# Altium PCB PCB1.PcbDoc
Units mm, origin at the board's own origin, x right, y up, seen from the top; angles counter-clockwise.
Board outline 152.4 x 101.6 mm, 2 copper layers (Top Layer, Bottom Layer); 11 components, 8 nets, 24 pads, 2 vias.
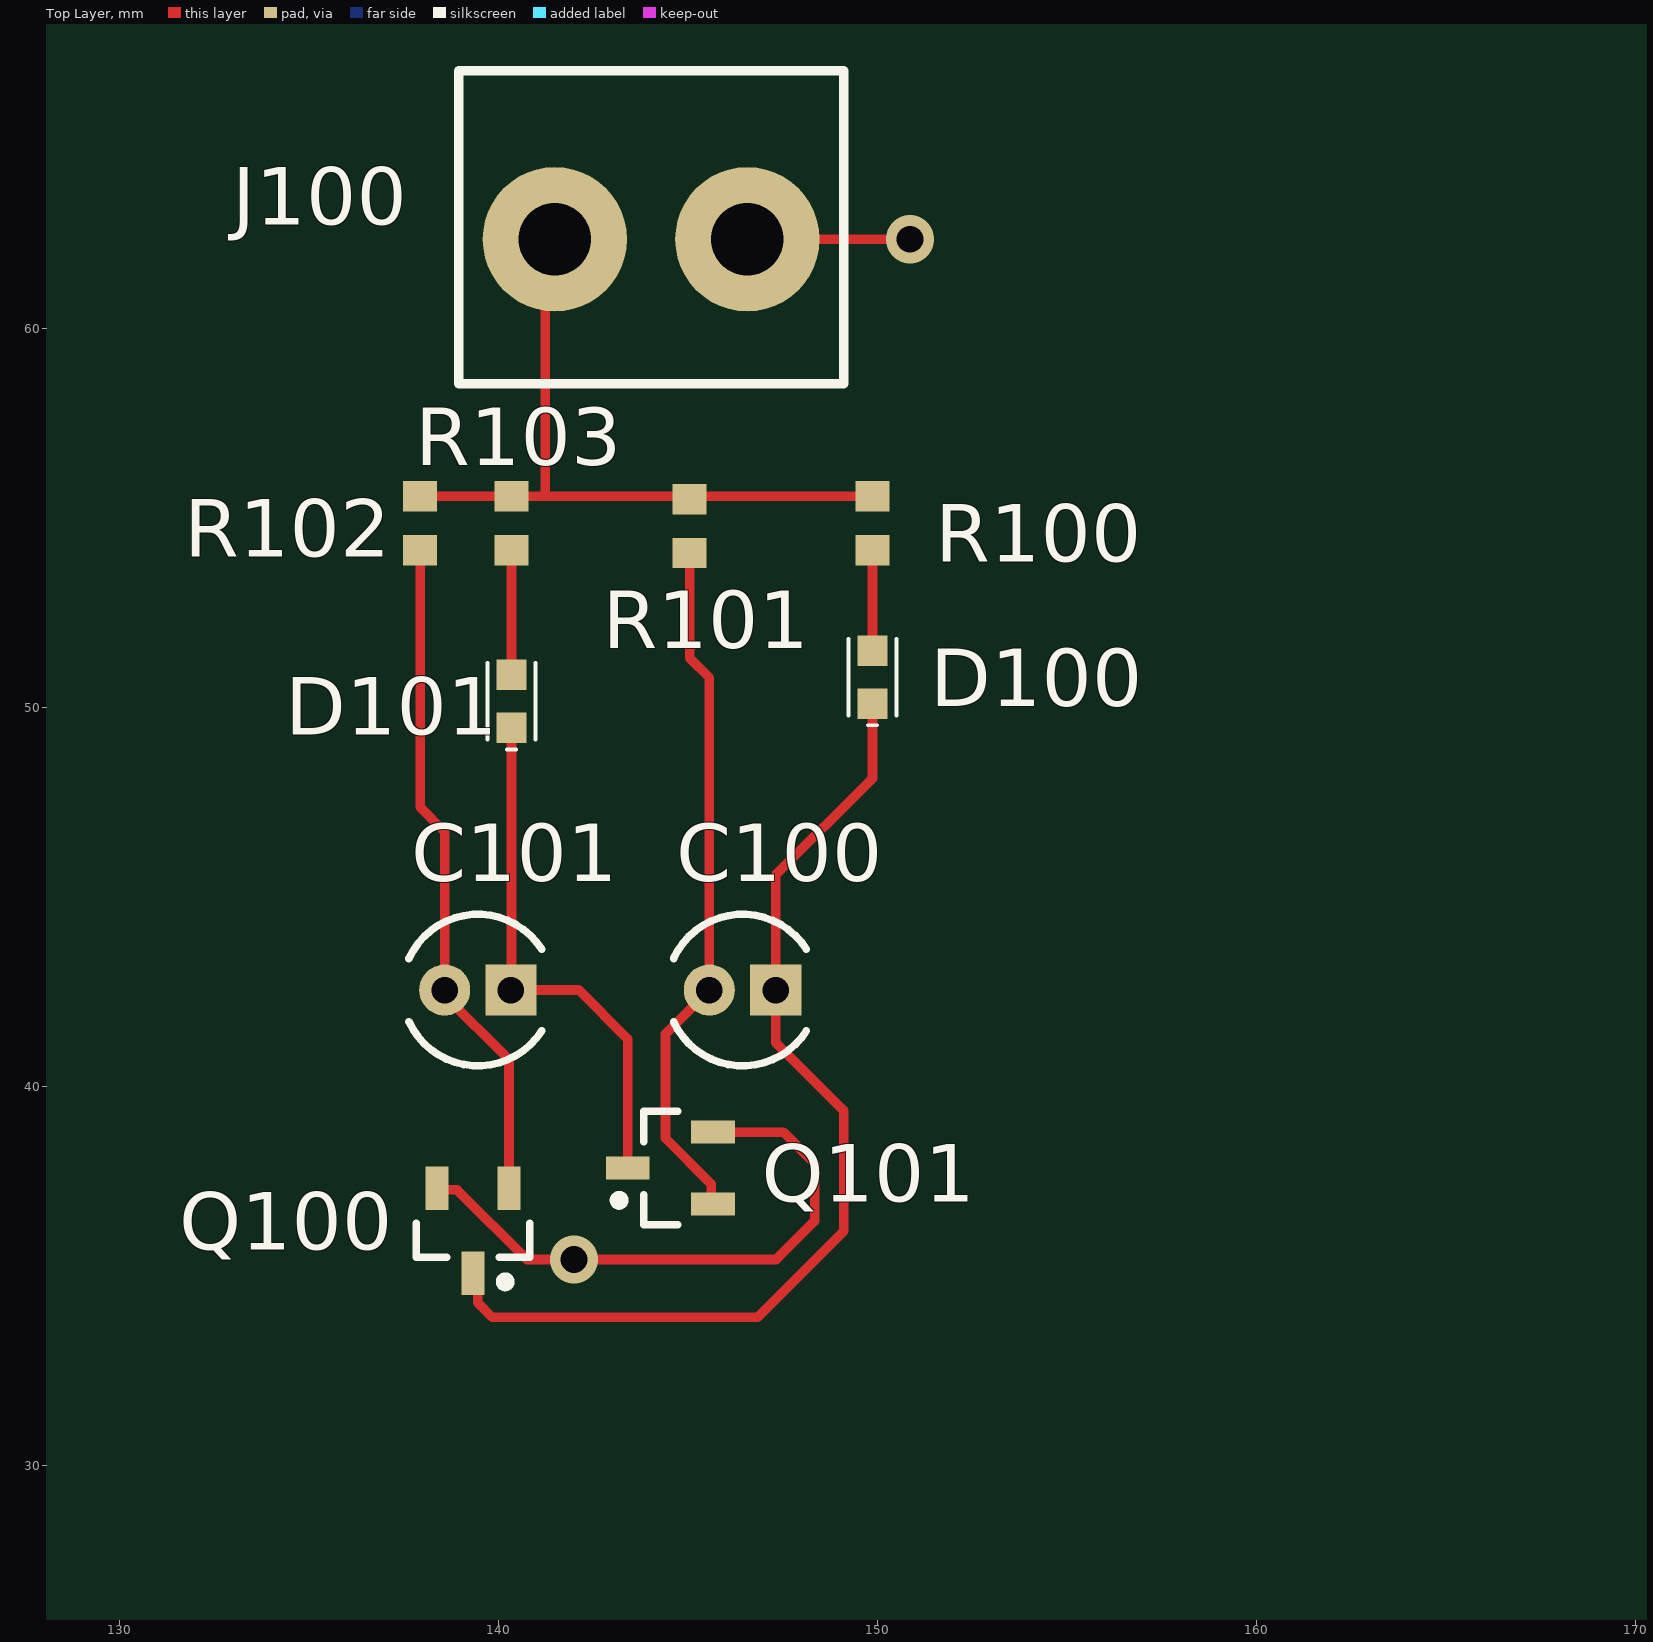
[diagram p0: Top Layer view]
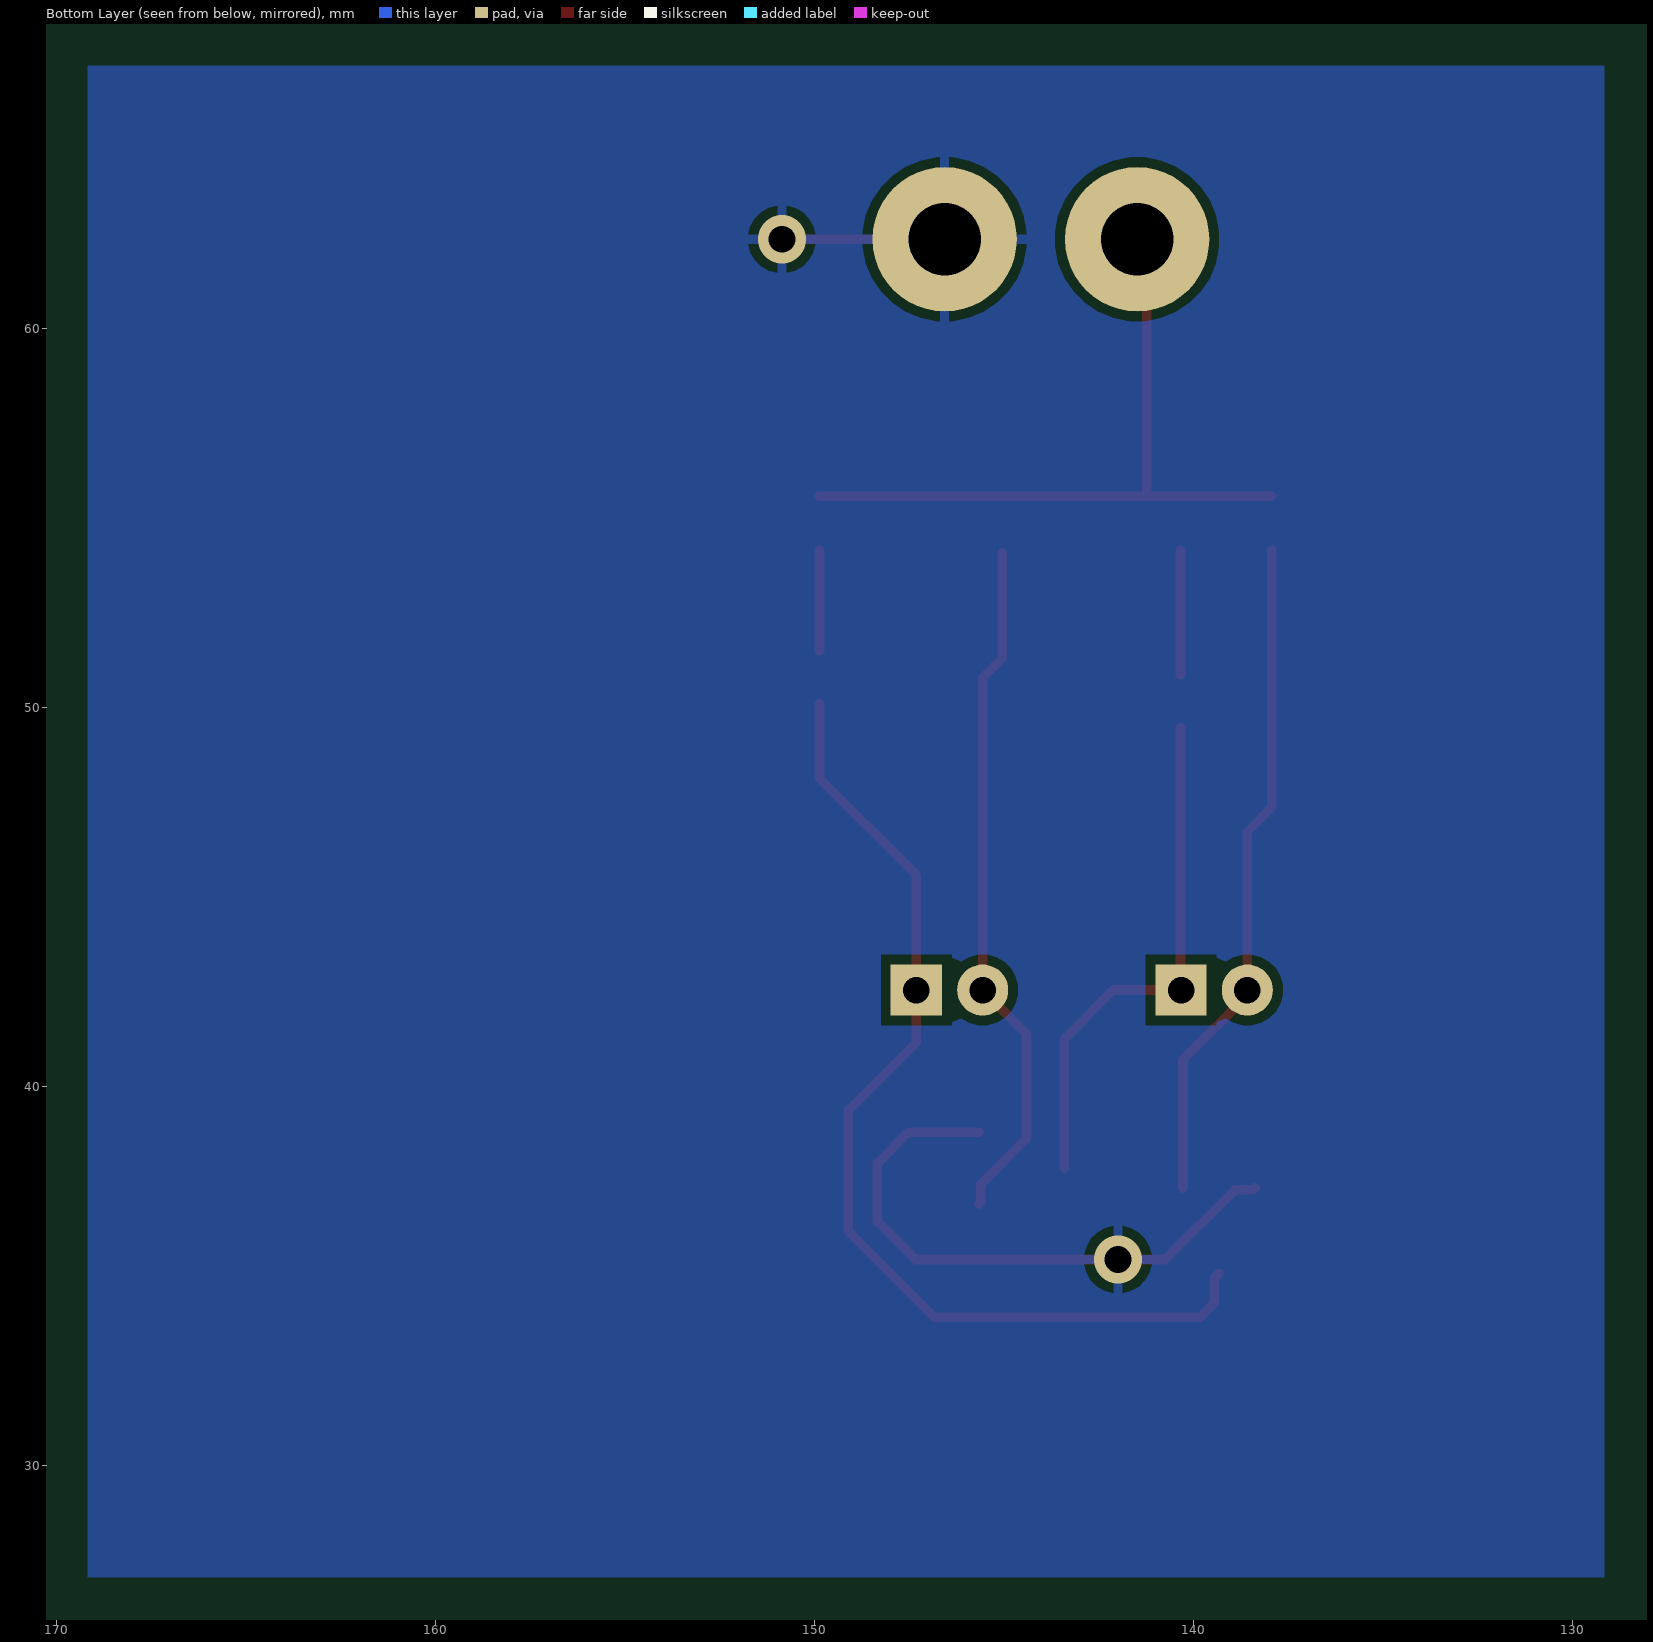
[diagram p1: Bottom Layer view, seen from below]
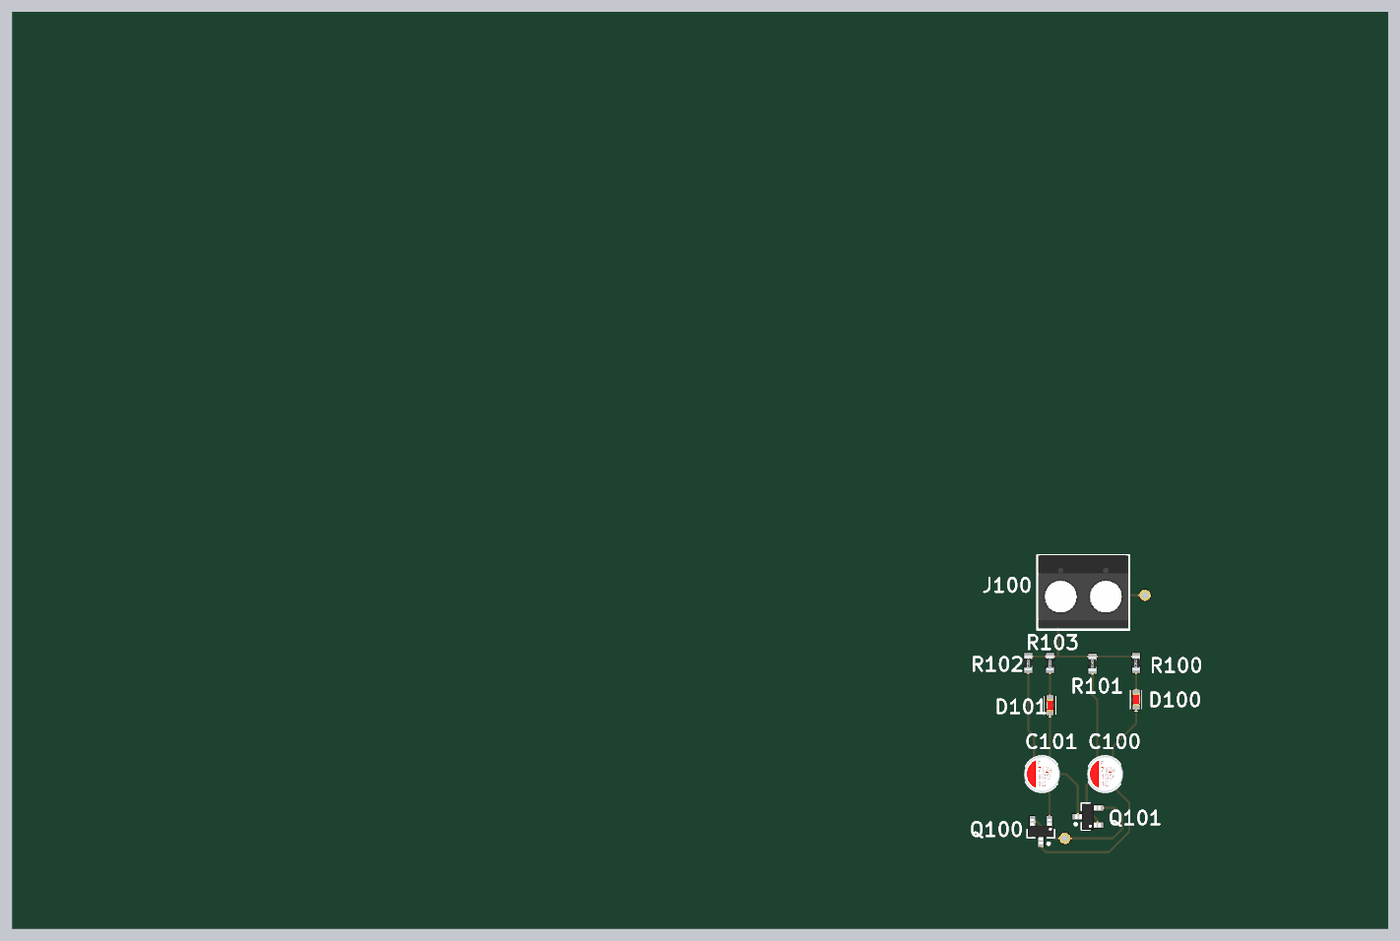
[diagram p2: 3D render of the assembled board from above, using the file's embedded part models]

## Layer stack, top to bottom
Top Solder: solder mask 0.0102, Solder Resist, Dk 3.5
Top Layer: signal copper 0.0356
Dielectric 1: dielectric 0.32, FR-4, Dk 4.8
Bottom Layer: signal copper 0.0356
Bottom Solder: solder mask 0.0102, Solder Resist, Dk 3.5

## Board outline
25.4,25.4 177.8,25.4 177.8,127 25.4,127

## Design rules (kind name [scope] priority, off if disabled: settings)
Clearance [All] p1: gap=0.254 ignorepadtopadclearanceinfootprint=TRUE except(0: Arc-Hole Track-Hole SMDPad-Hole THPad-Hole Via-Hole Fill-Hole Poly-Hole Region-Hole Text-Hole)
MinimumSolderMaskSliver [All] p1: minsoldermaskwidth=0.054
PolygonConnect [All] p1: connectstyle=Relief reliefconductorwidth=0.254 reliefentries=4 polygonreliefangle="90 Angle" airgapwidth=0.254
RoutingVias [All] p1: holewidth=0.711 width=1.27 viastyle="Through Hole" minholewidth=0.711 minwidth=1.27 maxholewidth=0.711 maxwidth=1.27
SilkToSolderMaskClearance [IsPad] p1: minsilkscreentomaskgap=0.054 clearancetoexposedcopper=TRUE
SolderMaskExpansion [All] p1: expansion=0.102 istentingtop=FALSE
SupplyNets "Schematic Supply Nets_1" [InNet('9V')] p1: voltage=0.000
SupplyNets "Schematic Supply Nets" [InNet('GND')] p2: voltage=0.000
Width [All] p1: maxlimit=0.254 minlimit=0.254 preferedwidth=0.254
28 further rules are at their usual default settings.

## Components (designator, comment, footprint, x,y, rotation, side; value= is the part's Value field where it differs from the comment)
C100 "Cap2" CAPR5-4X5 146.431,42.545 r180 top value=10uF
C101 "Cap2" CAPR5-4X5 139.446,42.545 r180 top value=10uF
D100 "LED_SMD" 0603_LED 149.86,50.8 r270 top value=RED
D101 "LED_SMD" 0603_LED 140.335,50.165 r270 top value=RED
J100 "2 PIN" "Header 2_PIN" 141.478,62.357 r0 top
Q100 "MMBT4401" SOT23_N 139.319,36.195 r270 top
Q101 "MMBT4401" SOT23_N 144.526,37.846 r180 top
R100 "Res1" R0603 149.86,54.864 r270 top value=470R
R101 "Res1" R0603 145.034,54.788 r270 top value=47K
R102 "Res1" R0603 137.922,54.864 r270 top value=47K
R103 "Res1" R0603 140.335,54.864 r270 top value=470R

## Footprints (in the part's own frame and the unit in brackets; to place one, negate y for a bottom-side part, rotate by r counter-clockwise, add the part's x,y. Pads: shape width x height; smd on the part's side, far side on the other; paste and mask are expansions set on the pad)
0603_LED [mm] "LED"
  rect 0.8x0.8 smd: 1(-0.7,0) 2(0.7,0)
  silkscreen extent -1.02,-0.64 1.27,0.64, body extent -0.8,-0.4 0.8,0.4, height 0.6
CAPR5-4X5 [mm] "Capacitor; 2 Leads"
  rect 1.35x1.35 hole 0.7: 1(-0.875,0)
  round 1.35 hole 0.7: 2(0.875,0)
  silkscreen extent -1.69,-2 1.82,2, body extent -2,-2 2,2, height 4.71
"Header 2_PIN" [mm] "200 mils"
  round 3.81 hole 1.905: 1(0,0) 2(5.08,0)
  silkscreen extent -2.54,-3.81 7.62,4.44, body extent -2.46,-3.55 7.54,4.44, height 10.03
R0603 [mm] "Chip Capacitor, Body 1.6x0.8mm, IPC High Density"
  rect 0.8x0.9 smd: 1(-0.711,0) 2(0.711,0)
  body extent -0.8,-0.43 0.84,0.41, height 0.41
SOT23_N [mm] "SOT23, 3-Leads, Body 2.9x1.3mm, Pitch 0.95mm, Lead Span 2.3mm - Reverse Pinning, IPC Medium Density"
  rect 1.15x0.6 smd: 1(1.125,0) 2(-1.125,-0.95) 3(-1.125,0.95)
  silkscreen extent -0.2,-1.5 1.47,1.5, body extent -1.4,-1.45 1.4,1.45, height 1.3

## Part data
C100 C101: "Capacitor", PackageDescription="Capacitor; 2 Leads", PackageReference=CAPR5-4X5
D100 D101: "LED RED CLEAR 0603 SMD", Digikey Part Number=160-1447-1-ND, Manufacturer Part Number=LTST-C191KRKT, PackageDescription="1.60mm L x 0.80mm W", PackageReference="0603 (1608 Metric)"
J100: library part Connector_2Pin
Q100 Q101: library part NPN, "NPN Bipolar Transistor", Digikey Part Number=MMBT4401LT1GOSCT-ND, Manufacturer="ON Semiconductor", Manufacturer Part Number=MMBT4401LT1G, PackageDescription="SOT-23-3 (TO-236)", PackageReference="SOT-23-3 (TO-236)"
R100 R101 R102 R103: "Resistor", PackageDescription="Axial Device, Thru-Hole; 2 Leads; 0.3 in Pin Spacing", PackageReference=AXIAL-0.3

## Via types
v1: diameter 1.27, hole 0.711, Top Layer to Bottom Layer, 2 vias

## Nets (pads, with @x,y where several pads share a name; then routed paths per layer and width w, separated by ;. In a path a pad name is that pad's centre, name@x,y a point inside that pad or via, vN(x,y) a via of type N, cw(c..) or ccw(c..) an arc to the next point about the centre after c; other vN are vias at no path point)
9V: J100.1 R100.1 R101.1 R102.1 R103.1 | length 18.8
  Top Layer w0.254: R102.1 R103.1 R100.1 ; 141.224,55.648 141.224,62.103 J100.1
GND: J100.2 Q100.2 Q101.2 | length 20
  Top Layer w0.254: Q100.2 138.415,37.274 138.901,37.274 140.742,35.433 v1(141.986,35.433) 147.32,35.433 148.336,36.449 148.336,37.968 147.508,38.796 Q101.2 ; J100.2 v1(150.854,62.357)
NetC100_1: C100.1 D100.2 Q100.1 | length 27.3
  Top Layer w0.254: Q100.1 139.445,34.944 139.445,34.291 139.827,33.909 146.828,33.909 149.098,36.179 149.098,39.37 147.306,41.162 C100.1 147.306,45.579 149.86,48.133 D100.2
NetC100_2: C100.2 Q101.3 R101.2 | length 18.4
  Top Layer w0.254: R101.2 145.034,51.308 145.556,50.786 C100.2 144.399,41.388 144.399,38.634 145.605,37.428 145.605,36.942 Q101.3
NetC101_1: C101.1 D101.2 Q101.1 | length 14
  Top Layer w0.254: D101.2 140.335,42.559 C101.1 142.113,42.545 143.401,41.257 Q101.1
NetC101_2: C101.2 Q100.3 R102.2 | length 17.8
  Top Layer w0.254: R102.2 137.922,47.371 138.571,46.722 C101.2 138.571,42.406 140.269,40.708 Q100.3
NetD100_1: D100.1 R100.2 | length 2.7
  Top Layer w0.254: D100.1 R100.2
NetD101_1: D101.1 R103.2 | length 3.3
  Top Layer w0.254: D101.1 R103.2

## Polygon pours and split planes (outlines as drawn)
no net on Mechanical 1 "NONET_L01_P-001" (none): 169.164,66.99 169.164,46.99 169.164,26.99 129.164,26.99 129.164,66.99
GND on Bottom Layer "NONET_L01_P-001" (solid, pour order 0): 129.159,66.929 169.164,66.929 169.164,27.051 129.159,27.051